# EAGLE board 4-to-1-mux (EAGLE 9.7.0)

Size 156.7 x 74.57 mm. Coordinates in mm from the lower left corner, seen from the top.
Outline: 0,0 156.7,0 156.7,74.57 0,74.57 0,0
Copper layers (1*16): Top 0.035mm / dielectric 1.5mm / Bottom 0.035mm
Design rules "default": minimum track width 6mil, minimum drill 0.35mm, track to track 6mil, track to pad 6mil, pad to pad 6mil, via to via 6mil, smd to smd 6mil, copper to edge 40mil, drill to drill 6mil, minimum pad ring 10mil, minimum via ring 8mil, stop-mask expansion 4mil, vias tented up to drill 0mil, thermal gap 10mil

## Footprints (pad centres in the part's own frame; a part is rotated, then mirrored left to right if it is on the bottom)
LEDRD254W60D565H860B = drill 0.981 pad 1.581: 1 -1.27,0; 2 1.27,0
BATTERY-GENERIC = drill 1.118 pad 3.15 octagon: + 2.54,0; - -2.54,0
RESAD1016W63L850D250B = drill 0.83 pad 1.43: 1 -5.08,0; 2 5.08,0
78B04ST = drill 0.8: 1 -3.81,-3.81; 2 -1.27,-3.81; 3 1.27,-3.81; 4 3.81,-3.81; 5 3.81,3.81; 6 1.27,3.81; 7 -1.27,3.81; 8 -3.81,3.81
DIP762W53P254L1969H508Q14B = drill 0.743 pad 1.343: 1 -3.81,7.62; 2 -3.81,5.08; 3 -3.81,2.54; 4 -3.81,0; 5 -3.81,-2.54; 6 -3.81,-5.08; 7 -3.81,-7.62; 8 3.81,-7.62; 9 3.81,-5.08; 10 3.81,-2.54; 11 3.81,0; 12 3.81,2.54; 13 3.81,5.08; 14 3.81,7.62

## Placement (x,y rotation side)
D1  RED  [LEDRD254W60D565H860B]  121.03,19.13 180 top
P1  BATTERYGENERIC  [BATTERY-GENERIC]  148.44,48.81 180 top
R1  1k  [RESAD1016W63L850D250B]  119.76,8.97 90 top
SW1  SPST-478B04ST  [78B04ST]  9.27,28.02 0 top
U1  74HC04_PDIP  [DIP762W53P254L1969H508Q14B]  38.48,10.24 90 top
U2  74HC08_PDIP  [DIP762W53P254L1969H508Q14B]  63.88,10.24 90 top
U3  74HC32_PDIP  [DIP762W53P254L1969H508Q14B]  91.82,10.24 90 top
U4  74HC08_PDIP  [DIP762W53P254L1969H508Q14B]  79.27,66.91 90 top

## Library data of the parts
D1 = Tinkercad; CATEGORY: Opto-Electronic; SUB-CATEGORY: LED; VALUE: LED_RED
P1 R1 SW1 U1-U4 = Tinkercad

## Nets
D1_C: D1.2 R1.2
P1+: P1.+ SW1.5 SW1.6 SW1.7 SW1.8 U1.14 U2.4 U2.13 U2.14 U3.14 U4.14
P1-: P1.- R1.1 U1.7 U2.1 U2.7 U2.10 U3.7 U4.7
U1_1A: SW1.1 U1.1 U4.1 U4.4
U1_1Y: U1.2 U4.9 U4.13
U1_2A: SW1.2 U1.3 U4.5 U4.10
U1_2Y: U1.4 U4.2 U4.12
U2_1Y: U2.3 U3.2
U2_2Y: U2.6 U3.9
U2_3Y: U2.8 U3.13
U2_4Y: U2.11 U3.12
U3_1Y: D1.1 U3.3
U3_3Y: U3.1 U3.8
U3_4Y: U3.10 U3.11
U4_1Y: U2.2 U4.3
U4_2Y: U2.5 U4.6
U4_3Y: U2.9 U4.8
U4_4Y: U2.12 U4.11

## Tracks (layer width: path | path; a pad name or v marks a point on that pad's centre or on a via)
D1_C  (1 unrouted)
P1+  (10 unrouted)
P1-  (7 unrouted)
U1_1A  (3 unrouted)
U1_1Y  (2 unrouted)
U1_2A  (3 unrouted)
U1_2Y  (2 unrouted)
U2_1Y  (1 unrouted)
U2_2Y  (1 unrouted)
U2_3Y  (1 unrouted)
U2_4Y  (1 unrouted)
U3_1Y  (1 unrouted)
U3_3Y  (1 unrouted)
U3_4Y  (1 unrouted)
U4_1Y  (1 unrouted)
U4_2Y  (1 unrouted)
U4_3Y  (1 unrouted)
U4_4Y  (1 unrouted)